# Altium PCB AccShelf.PcbDoc
Units mil, origin at the board's own origin, x right, y up, seen from the top; angles counter-clockwise.
Board outline 7677.17 x 2834.65 mil, 2 copper layers (Top Layer, Bottom Layer); 34 components, 51 nets, 183 pads, 99 vias.
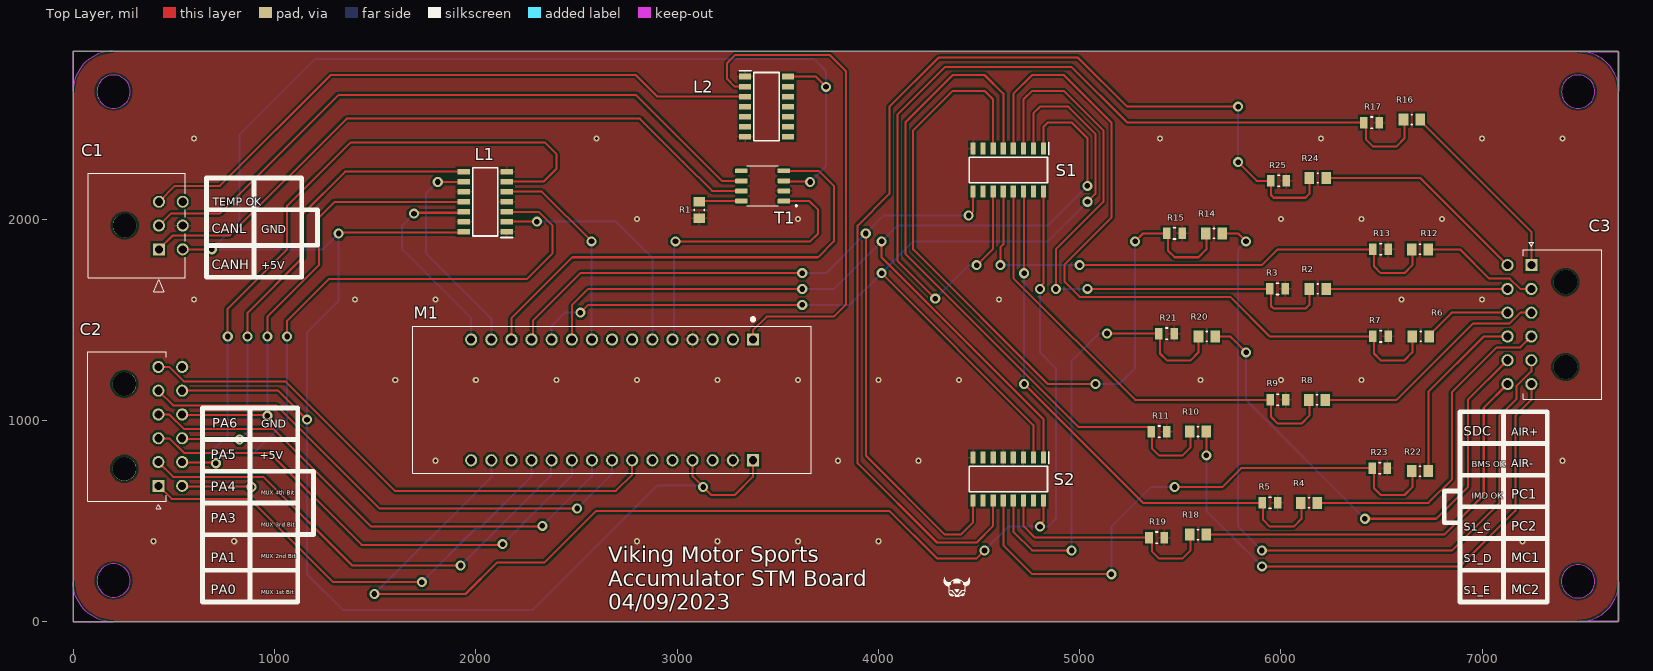
[diagram p0: Top Layer view]
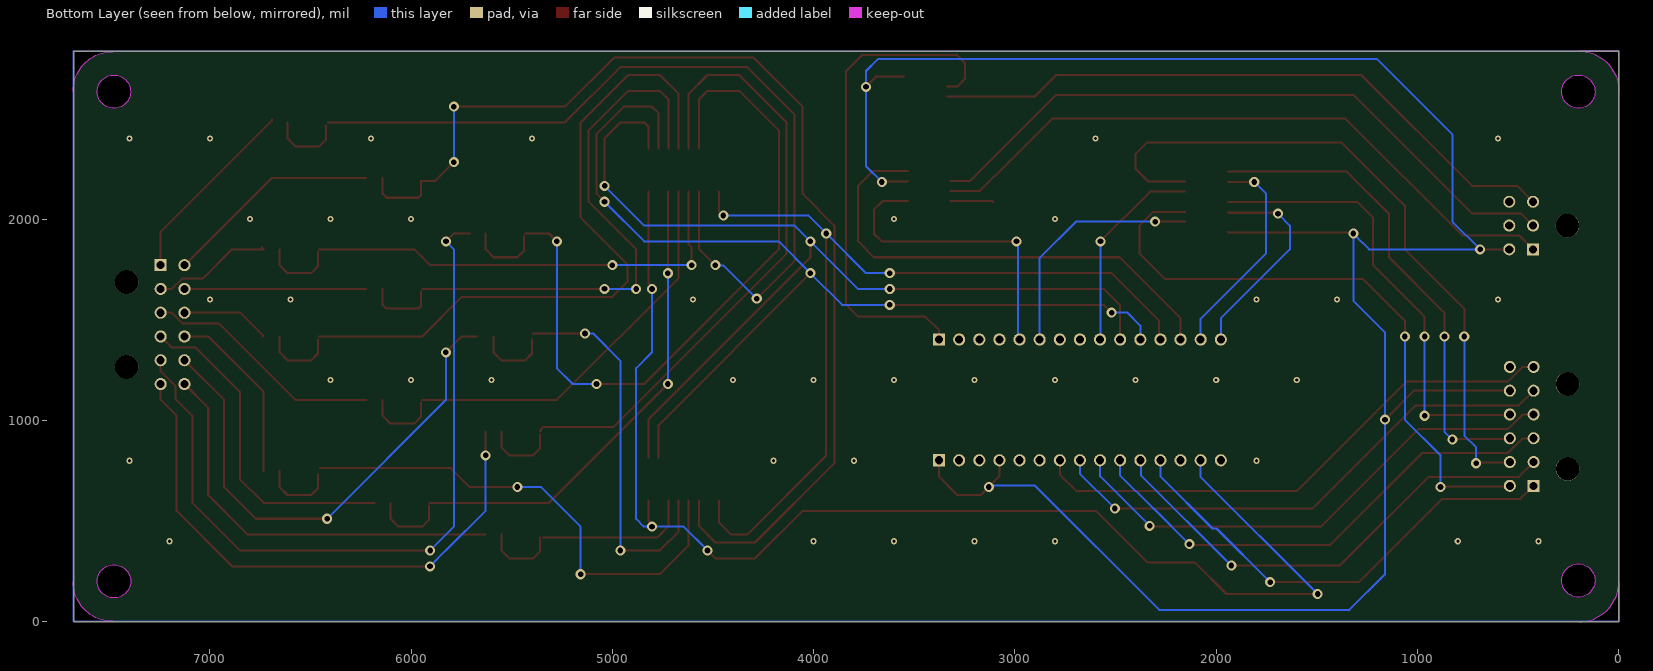
[diagram p1: Bottom Layer view, seen from below]
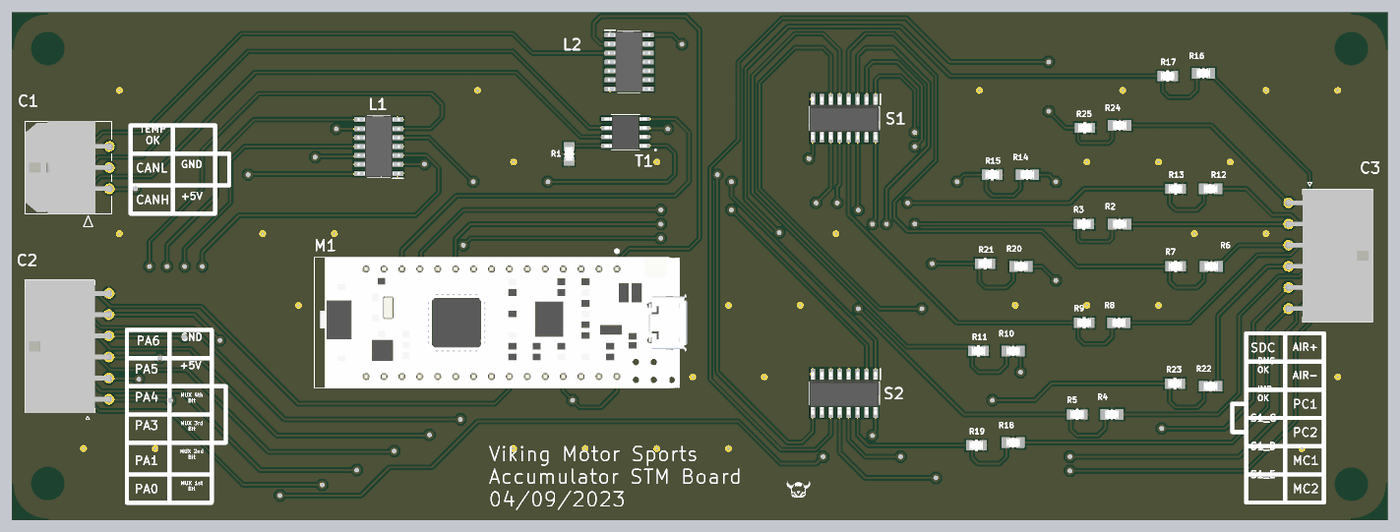
[diagram p2: 3D render of the assembled board from above, using the file's embedded part models]

## Layer stack, top to bottom
Top Solder: solder mask 0.4, Solder Resist, Dk 3.5
Top Layer: signal copper 1.4
Dielectric 1: dielectric 12.6, FR-4, Dk 4.8
Bottom Layer: signal copper 1.4
Bottom Solder: solder mask 0.4, Solder Resist, Dk 3.5

## Board outline
0,0 0,2834.65 7677.17,2834.65 7677.17,0
cut-out: 118.11,2633.72 ccw(c200.79,2633.72) 200.79,2551.05 ccw(c200.79,2633.72) 283.46,2633.72 ccw(c200.79,2633.72) 200.79,2716.4 ccw(c200.79,2633.72)
cut-out: 0,2834.65 196.85,2834.65 ccw(c196.85,2637.8) 0,2637.79
cut-out: 7393.7,2633.72 ccw(c7476.38,2633.72) 7476.38,2551.05 ccw(c7476.38,2633.72) 7559.06,2633.72 ccw(c7476.38,2633.72) 7476.38,2716.4 ccw(c7476.38,2633.72)
cut-out: 7482.1,1.54 ccw(c7482.1,198.21) 7678.77,198.21 7678.77,1.54
cut-out: 7678.77,2636.43 ccw(c7482.1,2636.43) 7482.1,2833.11 7678.77,2833.11
cut-out: 0,0 196.85,0 cw(c196.85,196.85) 0,196.85
cut-out: 118.11,204.99 ccw(c200.79,204.99) 200.79,122.32 ccw(c200.79,204.99) 283.46,204.99 ccw(c200.79,204.99) 200.79,287.67 ccw(c200.79,204.99)
cut-out: 7393.57,200.79 ccw(c7476.24,200.79) 7476.24,118.11 ccw(c7476.24,200.79) 7558.92,200.79 ccw(c7476.24,200.79) 7476.24,283.46 ccw(c7476.24,200.79)

## Design rules (kind name [scope] priority, off if disabled: settings)
Clearance [All] p1: gap=10 ignorepadtopadclearanceinfootprint=FALSE except(0: Arc-Hole Track-Hole SMDPad-Hole THPad-Hole Via-Hole Fill-Hole Poly-Hole Region-Hole Text-Hole)
PolygonConnect [All] p1: connectstyle=Relief reliefconductorwidth=10 reliefentries=4 polygonreliefangle="90 Angle" airgapwidth=10
RoutingVias [All] p1: holewidth=28 width=50 viastyle="Through Hole" minholewidth=28 minwidth=50 maxholewidth=28 maxwidth=50
SolderMaskExpansion [All] p1: expansion=4 istentingtop=FALSE
Width [All] p1: maxlimit=10 minlimit=10 preferedwidth=10
30 further rules are at their usual default settings.

## Components (designator, comment, footprint, x,y, rotation, side; value= is the part's Value field where it differs from the comment)
C1 "0430450601" "6 Pin Dual Connector" 425.98,1850.39 r270 top
C2 "2125281200" "12 Pin Dual Inline Connector" 423.29,675.49 r270 top
C3 "2125281200" "12 Pin Dual Inline Connector" 7244.09,1771.65 r90 top
L1 "74AHCT125S14-13" "Level Shifter" 2047.24,2086.61 r180 top
L2 "74AHCT125S14-13" "Level Shifter" 3444.88,2559.06 r0 top
M1 "NUCLEO-F303K8" "STM Footprint" 2677.17,1102.36 r270 top
R1 "CRCW080510K0FKEA" FP-CRCW0805-e3-IPC_A 3110.24,2045.24 r90 top value=10kR
R2 "CRCW0805270KFKEA" FP-CRCW0805-e3-IPC_A 6183.1,1653.54 r180 top
R3 "CRCW0805100KFKEA" FP-CRCW0805-e3-MFG 5983.27,1653.54 r0 top
R4 "CRCW0805270KFKEA" FP-CRCW0805-e3-IPC_A 6139.73,590.55 r180 top
R5 "CRCW0805100KFKEA" FP-CRCW0805-e3-MFG 5945.87,590.55 r0 top
R6 "CRCW0805270KFKEA" FP-CRCW0805-e3-IPC_A 6694.92,1417.32 r180 top
R7 "CRCW0805100KFKEA" FP-CRCW0805-e3-MFG 6495.08,1417.32 r0 top
R8 "CRCW0805270KFKEA" FP-CRCW0805-e3-IPC_A 6179.1,1102.36 r180 top
R9 "CRCW0805100KFKEA" FP-CRCW0805-e3-MFG 5985.24,1102.36 r0 top
R10 "CRCW0805270KFKEA" FP-CRCW0805-e3-IPC_A 5588.55,944.88 r180 top
R11 "CRCW0805100KFKEA" FP-CRCW0805-e3-MFG 5394.69,944.88 r0 top
R12 "CRCW0805270KFKEA" FP-CRCW0805-e3-IPC_A 6690.91,1850.39 r180 top
R13 "CRCW0805100KFKEA" FP-CRCW0805-e3-MFG 6495.08,1850.39 r0 top
R14 "CRCW0805270KFKEA" FP-CRCW0805-e3-IPC_A 5667.29,1929.13 r180 top
R15 "CRCW0805100KFKEA" FP-CRCW0805-e3-MFG 5471.46,1929.13 r0 top
R16 "CRCW0805270KFKEA" FP-CRCW0805-e3-IPC_A 6650.68,2495.08 r180 top
R17 "CRCW0805100KFKEA" FP-CRCW0805-e3-MFG 6450.98,2480.31 r0 top
R18 "CRCW0805270KFKEA" FP-CRCW0805-e3-IPC_A 5588.55,433.07 r180 top
R19 "CRCW0805100KFKEA" FP-CRCW0805-e3-MFG 5383.12,418.31 r0 top
R20 "CRCW0805270KFKEA" FP-CRCW0805-e3-IPC_A 5631.92,1417.32 r180 top
R21 "CRCW0805100KFKEA" FP-CRCW0805-e3-MFG 5432.21,1432.09 r0 top
R22 "CRCW0805270KFKEA" FP-CRCW0805-e3-IPC_A 6690.91,748.03 r180 top
R23 "CRCW0805100KFKEA" FP-CRCW0805-e3-MFG 6491.2,762.8 r0 top
R24 "CRCW0805270KFKEA" FP-CRCW0805-e3-IPC_A 6183.1,2204.72 r180 top
R25 "CRCW0805100KFKEA" FP-CRCW0805-e3-MFG 5989.11,2190.94 r0 top
S1 "SN74HC165QDRQ1" "Shift Register" 4645.67,2244.09 r270 top
S2 "SN74HC165QDRQ1" "Shift Register" 4645.67,708.66 r270 top
T1 "MCP2551-I/SN" "CAN Transceiver" 3425.2,2165.35 r180 top

## Footprints (in the part's own frame and the unit in brackets; to place one, negate y for a bottom-side part, rotate by r counter-clockwise, add the part's x,y. Pads: shape width x height; smd on the part's side, far side on the other; paste and mask are expansions set on the pad)
"6 Pin Dual Connector" [mm]
  rect 1.52x1.52 hole 1.02 mask+0.076: 1(0,0)
  round 1.52 hole 1.02 mask+0.076: 2(-3,0) 3(-6,0) 4(0,3) 5(-3,3) 6(-6,3)
  round 3 hole 3 unplated mask+0.076: M1(-3,-4.32)
  silkscreen extent -9.57,-8.92 5.35,3.32, body extent -9.59,-8.91 3.56,3.33, height 8.78
"12 Pin Dual Inline Connector" [mm]
  rect 1.52x1.52 / inner round 1.52 / far side rect 1.52x1.52 hole 1.02 mask+0.076: 1(0,0)
  round 1.52 hole 1.02 mask+0.076: 2(-3,0) 3(-6,0) 4(-9,0) 5(-12,0) 6(-15,0) 7(0,3) 8(-3,3) 9(-6,3) 10(-9,3) 11(-12,3) 12(-15,3)
  round 3 hole 3 unplated mask+0.076: ""(-12.84,-4.3) ""(-2.14,-4.3)
  silkscreen extent -16.93,-8.9 2.9,1.01, body extent -16.92,-8.89 1.93,3.29, height 8.81
"CAN Transceiver" [mm]
  rrect25% 1.58x0.6 smd: 1(-2.67,1.905) 2(-2.67,0.635) 3(-2.67,-0.635) 4(-2.67,-1.905) 5(2.67,-1.905) 6(2.67,-0.635) 7(2.67,0.635) 8(2.67,1.905)
  silkscreen extent -4.35,-2.52 1.99,2.6, body extent -3,-2.45 3,2.45, height 1.76
FP-CRCW0805-e3-IPC_A [mil]
  rect 47.5x59.38 smd paste+0 mask+0: 1(-41.37,0) 2(41.37,0)
  silkscreen extent -3,-25 3,25, body extent -85,-49 85,49, height 10
FP-CRCW0805-e3-MFG [mm]
  rect 0.95x1.45 smd paste+0 mask+0: 1(-0.975,0) 2(0.975,0)
  silkscreen extent -0.13,-0.7 0.13,0.7, body extent -1.55,-0.82 1.55,0.82, height 0.25
"Level Shifter" [mm]
  rect 1.528x0.7 smd: 1(-2.711,3.81) 2(-2.711,2.54) 3(-2.711,1.27) 4(-2.711,0) 5(-2.711,-1.27) 6(-2.711,-2.54) 7(-2.711,-3.81) 8(2.711,-3.81) 9(2.711,-2.54) 10(2.711,-1.27) 11(2.711,0) 12(2.711,1.27) 13(2.711,2.54) 14(2.711,3.81)
  silkscreen extent -3.47,-4.32 1.6,4.51, body extent -10,-3.38 10,3.38, height 5.8
"Shift Register" [mm]
  rect 1.525x0.65 smd: 1(-2.712,4.445) 2(-2.712,3.175) 3(-2.712,1.905) 4(-2.712,0.635) 5(-2.712,-0.635) 6(-2.712,-1.905) 7(-2.712,-3.175) 8(-2.712,-4.445) 9(2.712,-4.445) 10(2.712,-3.175) 11(2.712,-1.905) 12(2.712,-0.635) 13(2.712,0.635) 14(2.712,1.905) 15(2.712,3.175) 16(2.712,4.445)
  silkscreen extent -3.47,-4.95 1.6,5.12, body extent -10,-3.38 10,3.38, height 5.8
"STM Footprint" [mm]
  rect 1.53x1.53 hole 1.02: 1(-7.62,17.78) 16(7.62,17.78)
  round 1.53 hole 1.02: 2(-7.62,15.24) 3(-7.62,12.7) 4(-7.62,10.16) 5(-7.62,7.62) 6(-7.62,5.08) 7(-7.62,2.54) 8(-7.62,0) 9(-7.62,-2.54) 10(-7.62,-5.08) 11(-7.62,-7.62) 12(-7.62,-10.16) 13(-7.62,-12.7) 14(-7.62,-15.24) 15(-7.62,-17.78) 17(7.62,15.24) 18(7.62,12.7) 19(7.62,10.16) 20(7.62,7.62) 21(7.62,5.08) 22(7.62,2.54) 23(7.62,0) 24(7.62,-2.54) 25(7.62,-5.08) 26(7.62,-7.62) 27(7.62,-10.16) 28(7.62,-12.7) 29(7.62,-15.24) 30(7.62,-17.78)
  silkscreen extent -10.36,-25.14 9.27,25.14, body extent -9.27,-24.29 9.27,27.71, height 8.51

## Part data
C1: "Rectangular Power Connector, 6 Contact(s), Male, Solder Terminal, Receptacle", Color=Black, Contact Resistance=10mR, Dielectric Withstanding Voltage (AC)=1.5kV, Flammability Rating="UL94 V-0", Insulation Resistance=1GR, Manufacturer=Sullins, Manufacturer Part Number=PPPC032LJBN-RC, Max Operating Temperature=105°C, Min Operating Temperature=-40°C, Package Quantity=1000, Rated Current (Signal)=5A, Supplier Part Number=S5556-ND, Board Mounting Option=PEG, Body Breadth=0.345inch, Body Depth=0.48inch, Body Length=0.498inch, Body/Shell Style=RECEPTACLE, Category=Connectors, ComponentLink1Description=https://drawings-pdf.s3.amazonaws.com/10494.pdf?src-supplier=Digi-Key, ComponentLink1URL=https://drawings-pdf.s3.amazonaws.com/10494.pdf?src-supplier=Digi-Key, ComponentLink2Description=http://www.farnell.com/datasheets/2696385.pdf?src-supplier=Farnell, ComponentLink2URL=http://www.farnell.com/datasheets/2696385.pdf?src-supplier=Farnell, ComponentLink3Description=http://www.farnell.com/datasheets/2696385.pdf?src-supplier=Newark, ComponentLink3URL=http://www.farnell.com/datasheets/2696385.pdf?src-supplier=Newark, ComponentLink4Description=http://www.farnell.com/datasheets/2696385.pdf?src-supplier=Element14, ComponentLink4URL=http://www.farnell.com/datasheets/2696385.pdf?src-supplier=Element14, ComponentLink5Description=https://datasheet.ciiva.com:443/pdfs/VipMasterIC/IC/MOLE/MOLE-S-A0003536766/MOLE-S-A0003536766-1.pdf?src-supplier=IHS+Markit, ComponentLink5URL=https://datasheet.ciiva.com:443/pdfs/VipMasterIC/IC/MOLE/MOLE-S-A0003536766/MOLE-S-A0003536766-1.pdf?src-supplier=IHS+Markit, Connector Type=Header, Contact Finish - Mating="MATTE TIN", Contact Finish - Termination="Matte Tin (Sn) - with Nickel (Ni) barrier", Contact Gender=Male, Contact Material=Bronze, Contact Pattern=RECTANGULAR, Contact Plating=Gold, Contact Style="SQ PIN-SKT", Contact Type="Female Socket", DIN Conformance=No, Durability=30Cycles, Empty Shell=No, Filter Feature=No, Height=5mm, Housing Color=Black, Housing Material=Plastic, IEC Conformance=No, Insertion Force-Max=11.5648N, Insulation Color=Black, Insulation Material=Polymer, JESD-609 Code=e3, Lead Free="Lead Free", Length=8.12mm, Mating Contact Pitch=0.118inch, Mating Contact Row Spacing=0.118inch, Mating Information="MULTIPLE MATING PARTS AVAILABLE", MIL Conformance=No, Mixed Contacts=No, Mounting Option 1="POLARIZED LCK", Mounting Option 2=LOCKING, Mounting Style="RIGHT ANGLE", Mounting Technology="Through Hole", Number Of Connectors=1, Number of Contacts=6, Number Of PCB Rows=2, Number of Positions=6, Number of Rows=2, Number of Rows Loaded=2, Option="General Purpose", Packaging=Bulk, PCB Contact Pattern=RECTANGULAR, PCB Contact Row Spacing=2.9972mm, Pitch=0.1inch, Plating Thickness=15uin, Polarization Key="POLARIZED HOUSING", Pricing="1=0.87000, 10=0.73600, 100=0.66130, 500=0.54108, 1000=0.48096, 5000=0.43420 (USD)", Reach SVHC Compliant=Yes, Reference Standard=UL, Reliability=COMMERCIAL, RoHS=Yes, RoHS Compliant=Yes, Row Spacing=0.1inch, Shell Material=Polymer, Stock=1878, Supplier=Digi-Key, Terminal Length=0.125inch, Terminal Pitch=2.9972mm, Termination=Solder, Width=8.5mm, Withdrawl Force-Min=3.0024N
C2 C3: "Conn Micro-Fit Power HDR 12 POS 3mm Solder RA Through Hole 12 Terminal Single Port Tray", Manufacturer=Molex, Manufacturer Part Number=212528-1200, Package=None, Supplier Part Number=538-212528-1200, Availability=Unavailable, Category="Headers and Wire Housings", ComponentLink1Description=http://datasheet.octopart.com/2125281200-Molex-datasheet-147959482.pdf?src-supplier=Rs, ComponentLink1URL=http://datasheet.octopart.com/2125281200-Molex-datasheet-147959482.pdf?src-supplier=Rs, MF="{'manufacturer': u'Molex'}", MP=2125281200, Price=None, Pricing="1=3.35000, 10=2.96000, 50=2.96000, 100=2.96000, 1000=2.28000, 10000=1.94000 (USD)", RoHS=No, Stock=1070, Supplier=Mouser
L1 L2: library part SN74AHCT126DR, "Bus Driver, AHCT/VHCT/VT Series, 4-Func, 1-Bit, True Output, CMOS, PDSO14", Case/Package=SOP, Load Capacitance (CL)=50pF, Manufacturer=Diodes, Manufacturer_Name="Diodes Inc.", Max Operating Temperature=125°C, Max Supply Voltage=5.5V, Min Operating Temperature=-40°C, Min Supply Voltage=4.5V, Mouser Part Number=621-74AHCT125S14-13, Nominal Supply Voltage=5V, Package Body Material=Plastic, Package Equivalence Code=SOP14,.25, Package Shape=Rectangular, Package Style="SMALL OUTLINEMeter", Peak Reflow Temperature (Cel)=260°C, Power Supply Current-Max (ICC)=40uA, Temperature Grade=AUTOMOTIVE, Time @ Peak Reflow Temperature-Max (s)=40s, Arrow Part Number=74AHCT125S14-13, Arrow Price/Stock=https://www.arrow.com/en/products/74ahct125s14-13/diodes-incorporated?region=nac, Category="Buffers, Drivers and Transceivers", Channels=4, ComponentLink1Description=https://datasheet.ciiva.com:443/pdfs/VipMasterIC/IC/DIOD/DIODS15860/DIODS15860-1.pdf?src-supplier=IHS+Markit, ComponentLink1URL=https://datasheet.ciiva.com:443/pdfs/VipMasterIC/IC/DIOD/DIODS15860/DIODS15860-1.pdf?src-supplier=IHS+Markit, ComponentLink2Description=https://datasheet.ciiva.com/25651/74ahct125-25651120.pdf?src-supplier=Digi-Key, ComponentLink2URL=https://datasheet.ciiva.com/25651/74ahct125-25651120.pdf?src-supplier=Digi-Key, ComponentLink3Description=https://datasheet.ciiva.com/29883/74ahct125-29883446.pdf?src-supplier=Avnet, ComponentLink3URL=https://datasheet.ciiva.com/29883/74ahct125-29883446.pdf?src-supplier=Avnet, Control Type="ENABLE LOW", Datasheet Link=http://uk.rs-online.com/web/p/products/7988941, Geometry.Height=1.73mm, Height - Seated (Max)=1.73mm, JESD-30 Code=R-PDSO-G14, JESD-609 Code=e3, Length=8.635mm, Logic Type="BUS DRIVER", Manufacturer Part Number=74AHCT125S14-13, Manufacturer_Part_Number=74AHCT125S14-13, Max I(ol)=8mA, Moisture Sensitivity Level=1, Mouser Price/Stock=https://www.mouser.co.uk/ProductDetail/Diodes-Incorporated/74AHCT125S14-13?qs=pYVYkI7xuRUA0d%2Fp2SGl5A%3D%3D, Number of Bits=1, Number of Ports=2, Output Characteristics=3-STATE, Output Polarity=True, Packaging="Tape and Reel", Pins=14, Power Supplies=5V, Pricing="2500=0.06080, 5000=0.05862, 10000=0.05686, 15000=0.05520, 20000=0.05312, 25000=0.05229, 250000=0.05146 (USD)", Prop. Delay@Nom-Sup=9.5ns, Propagation Delay (tpd)=9.5ns, Qualification Status="Not Qualified", Reach SVHC Compliant=Yes, RoHS=Yes, RoHS Compliant=Yes, Stock=22500, Supplier=Avnet, Supplier Part Number=74AHCT125S14-13, Surface Mount=Yes, Technology=CMOS, Terminal Finish=Tin, Terminal Form="Gull Wing", Terminal Pitch=1.27mm, Terminal Position=DUAL, Width=3.895mm
M1: "Boards/Accessories", Manufacturer=STMicroelectronics, Supplier Part Number=68Y1244, Category="Embedded Processors and Controllers", ComponentLink1Description=http://www.farnell.com/datasheets/2064195.pdf?src-supplier=Farnell, ComponentLink1URL=http://www.farnell.com/datasheets/2064195.pdf?src-supplier=Farnell, ComponentLink2Description=http://www.st.com/content/ccc/resource/technical/document/data_brief/b1/d8/13/d4/b0/b7/4b/6e/DM00214578.pdf/files/DM00214578.pdf/jcr:content/translations/en.DM00214578.pdf?src-supplier=Digi-Key, ComponentLink2URL=http://www.st.com/content/ccc/resource/technical/document/data_brief/b1/d8/13/d4/b0/b7/4b/6e/DM00214578.pdf/files/DM00214578.pdf/jcr:content/translations/en.DM00214578.pdf?src-supplier=Digi-Key, ComponentLink3Description=http://www.st.com/st-web-ui/static/active/en/resource/technical/document/user_manual/DM00116575.pdf?s_searchtype=keyword&src-supplier=Avnet, ComponentLink3URL=http://www.st.com/st-web-ui/static/active/en/resource/technical/document/user_manual/DM00116575.pdf?s_searchtype=keyword&src-supplier=Avnet, ComponentLink4Description=http://www.farnell.com/datasheets/1966773.pdf?src-supplier=Element14, ComponentLink4URL=http://www.farnell.com/datasheets/1966773.pdf?src-supplier=Element14, ComponentLink5Description=http://www.farnell.com/datasheets/2064195.pdf?src-supplier=Newark, ComponentLink5URL=http://www.farnell.com/datasheets/2064195.pdf?src-supplier=Newark, Core Architecture=ARM, Evaluation Kit=Yes, Lead Free="Lead Free", Manufacturer Part Number=NUCLEO-F303K8, Number of Bits=32, Pricing="1=10.33000 (USD)", Reach SVHC Compliant=Yes, RoHS=No, Series=STM32F3, Stock=226, Supplier=Newark
R1: library part CMP-2001-04908-2, "RES Thick Film, 10kΩ, 1%, 0.125W, 100ppm/°C, 0805", Case Code (Imperial)=0805, Case Code (Metric)=2012, Manufacturer=Vishay, Max Operating Temperature=155°C, Min Operating Temperature=-55°C, Package Height=0.45mm, Package Length=2mm, Package Quantity=5000, Package Shape=Rectangular, Package Style=SMTMeter, Package Width=1.25mm, Power=125mW, Rated Temperature=70°C, Resistance=10kR, Resistor Type="FIXED RESISTOR", Supplier Part Number=24W3284, Temperature Coefficient=100ppm/°C, Tolerance=1%, Voltage Rating=150V, Case/Package=0805, Category="Chip SMD Resistors", ComponentLink1Description=https://datasheet.ciiva.com:443/pdfs/VipMasterIC/IC/VISH/VISH-S-A0007266705/VISH-S-A0007266705-1.pdf?src-supplier=IHS+Markit, ComponentLink1URL=https://datasheet.ciiva.com:443/pdfs/VipMasterIC/IC/VISH/VISH-S-A0007266705/VISH-S-A0007266705-1.pdf?src-supplier=IHS+Markit, ComponentLink2Description=https://datasheet.ciiva.com/46394/1720486-46394381.pdf?src-supplier=Element14, ComponentLink2URL=https://datasheet.ciiva.com/46394/1720486-46394381.pdf?src-supplier=Element14, ComponentLink3Description=https://datasheet.ciiva.com/16719/70201119-16719082.pdf?src-supplier=Allied+Electronics, ComponentLink3URL=https://datasheet.ciiva.com/16719/70201119-16719082.pdf?src-supplier=Allied+Electronics, ComponentLink4Description=https://datasheet.ciiva.com/16755/70201119-16755389.pdf?src-supplier=Allied+Electronics, ComponentLink4URL=https://datasheet.ciiva.com/16755/70201119-16755389.pdf?src-supplier=Allied+Electronics, ComponentLink5Description=https://datasheet.ciiva.com/5547/dcrcwe3-109170-5547559.pdf?src-supplier=Mouser, ComponentLink5URL=https://datasheet.ciiva.com/5547/dcrcwe3-109170-5547559.pdf?src-supplier=Mouser, Composition="Thick Film", Construction=Chip, Contact Plating=Tin, Depth=1.25mm, Height=0.45mm, JESD-609 Code=e3, Lead Free="Lead Free", Length=2mm, Manufacturer Part Number=CRCW080510K0FKEA, Military Standard=Not, Mounting Technology="Surface Mount", Packaging="Tape and Reel", Pins=2, Power Rating=125mW, Pricing="1=0.00800, 5000=0.00800 (USD)", Radiation Hardening=No, Reach SVHC Compliant=Yes, Reference Standard=AEC-Q200, RoHS=Yes, RoHS Compliant=Yes, Stock=980000, Supplier=Newark, Technology="METAL GLAZE/THICK FILM", Terminal Finish=Nickel, Termination=SMD/SMT, Voltage Rating (DC)=150V, Weight=0.000194oz, Width=1.25mm, Working Voltage=150V
R2 R4 R6 R8 R10 R12 R14 R16 R18 R20 R22 R24: library part CMP-2001-03733-2, "RES Thick Film, 270kΩ, 1%, 0.125W, 100ppm/°C, 0805", Case Code (Imperial)=0805, Case Code (Metric)=2012, Max Operating Temperature=155°C, Min Operating Temperature=-55°C, Package Quantity=5000, Power Rating=125mW, Resistance=270kR, Temperature Coefficient=100ppm/°C, Tolerance=1%, Voltage Rating=150V, Case/Package=0805, Composition="Thick Film", Contact Plating=Tin, Depth=1.25mm, Height=0.45mm, Lead Free="Lead Free", Length=2mm, Military Standard=Not, Number of Pins=2, Packaging="Tape and Reel", Radiation Hardening=No, Termination=SMD/SMT, Voltage Rating (DC)=150V, Weight=0.000194oz, Width=1.25mm
R3 R5 R7 R9 R11 R13 R15 R17 R19 R21 R23 R25: library part CMP-2001-04899-2, "RES Thick Film, 100kΩ, 1%, 0.125W, 100ppm/°C, 0805", Case Code (Imperial)=0805, Case Code (Metric)=2012, Max Operating Temperature=155°C, Min Operating Temperature=-55°C, Package Quantity=5000, Power Rating=125mW, Resistance=100kR, Temperature Coefficient=100ppm/°C, Tolerance=1%, Voltage Rating=150V, Case/Package=0805, Composition="Thick Film", Contact Plating=Tin, Depth=1.25mm, Height=0.45mm, Lead Free="Lead Free", Length=2mm, Military Standard=Not, Mount="Surface Mount", Number of Pins=2, Packaging="Tape and Reel", Radiation Hardening=No, Termination=SMD/SMT, Voltage Rating (DC)=150V, Weight=0.000194oz, Width=1.25mm
S1 S2: "Parallel In Serial Out, HC Series, 8-Bit, Right Direction, Complementary Output, CMOS, PDSO16", Case/Package=SOP, Manufacturer="Texas Instruments", Max Frequency@Nom-Sup=25MHz, Max Operating Temperature=125°C, Max Supply Voltage=6V, Min Operating Temperature=-40°C, Min Supply Voltage=2V, Mouser Part Number=595-SN74HC165QDRQ1, Nominal Supply Voltage=5V, Package Body Material=Plastic, Package Equivalence Code=SOP16,.25, Package Shape=Rectangular, Package Style="SMALL OUTLINEMeter", Peak Reflow Temperature (Cel)=260°C, Power Supplies=2/6V, Supplier Part Number=296-35928-1-ND, Temperature Grade=AUTOMOTIVE, Arrow Part Number=SN74HC165QDRQ1, Arrow Price/Stock=https://www.arrow.com/en/products/sn74hc165qdrq1/texas-instruments, Category="Shift Registers", Channels=1, Clock Edge Trigger Type="Positive Edge", ComponentLink1Description=https://www.ti.com:443/lit/ds/symlink/sn74hc165-q1.pdf?src-supplier=IHS+Markit, ComponentLink1URL=https://www.ti.com:443/lit/ds/symlink/sn74hc165-q1.pdf?src-supplier=IHS+Markit, ComponentLink2Description=https://datasheet.ciiva.com/18575/sn74hc165-q1-18575046.pdf?src-supplier=Digi-Key, ComponentLink2URL=https://datasheet.ciiva.com/18575/sn74hc165-q1-18575046.pdf?src-supplier=Digi-Key, ComponentLink3Description=https://datasheet.ciiva.com/18575/sn74hc165-q1-18575047.pdf?src-supplier=Digi-Key, ComponentLink3URL=https://datasheet.ciiva.com/18575/sn74hc165-q1-18575047.pdf?src-supplier=Digi-Key, ComponentLink4Description=https://datasheet.ciiva.com/18575/sn74hc165-q1-18575048.pdf?src-supplier=Digi-Key, ComponentLink4URL=https://datasheet.ciiva.com/18575/sn74hc165-q1-18575048.pdf?src-supplier=Digi-Key, ComponentLink5Description=https://datasheet.ciiva.com/48704/001074775-da-01-en-ic-shift-regi-sn74hc165qdrq1-soic-16-tid-48704119.pdf?src-supplier=Conrad, ComponentLink5URL=https://datasheet.ciiva.com/48704/001074775-da-01-en-ic-shift-regi-sn74hc165qdrq1-soic-16-tid-48704119.pdf?src-supplier=Conrad, Count Direction=RIGHT, Datasheet Link=http://www.ti.com/lit/gpn/sn74hc165-q1, fmax-Min=25MHz, Geometry.Height=1.75mm, Height - Seated (Max)=1.75mm, JESD-30 Code=R-PDSO-G16, JESD-609 Code=e4, Length=9.9mm, Logic Type="PARALLEL IN SERIAL OUT", Manufacturer Part Number=SN74HC165QDRQ1, Manufacturer_Name="Texas Instruments", Manufacturer_Part_Number=SN74HC165QDRQ1, Moisture Sensitivity Level=1, Mouser Price/Stock=https://www.mouser.co.uk/ProductDetail/Texas-Instruments/SN74HC165QDRQ1?qs=AgY10sKTvDLN6%2Fwfup846w%3D%3D, Number of Bits=8, Output Polarity=Complementary, Pins=16, Pricing="1=0.62000, 10=0.54200, 25=0.50920, 100=0.41570, 250=0.38612, 500=0.32860, 1000=0.26288 (USD)", Propagation Delay (tpd)=225ns, Qualification Status="Not Qualified", Reach SVHC Compliant=Yes, RoHS=Yes, RoHS Compliant=Yes, Supplier=Digi-Key, Surface Mount=Yes, Technology=CMOS, Terminal Finish=Nickel, Terminal Form="Gull Wing", Terminal Pitch=1.27mm, Terminal Position=DUAL, Width=3.9mm
T1: "CAN Transceiver, 1-Trnsvr, PDSO8", Case/Package=SOIC, Manufacturer=Microchip, Max Operating Temperature=85°C, Max Supply Current=75mA, Max Supply Voltage=5.5V, Min Operating Temperature=-40°C, Min Supply Voltage=4.5V, Operating Supply Voltage=5V, Package=None, Package Body Material=Plastic, Package Equivalence Code=SOP8,.25, Package Quantity=100, Package Shape=Rectangular, Package Style="SMALL OUTLINEMeter", Peak Reflow Temperature (Cel)=260°C, Supplier Part Number=69K7604, Temperature Grade=INDUSTRIAL, Time @ Peak Reflow Temperature-Max (s)=40s, Availability=Unavailable, Category="Interface ICs", Channels=1, ComponentLink1Description=https://datasheet.ciiva.com/27056/2040583-27056423.pdf?src-supplier=Jameco, ComponentLink1URL=https://datasheet.ciiva.com/27056/2040583-27056423.pdf?src-supplier=Jameco, ComponentLink2Description=https://datasheet.ciiva.com/8084/jp011797-8084592.pdf?src-supplier=Avnet, ComponentLink2URL=https://datasheet.ciiva.com/8084/jp011797-8084592.pdf?src-supplier=Avnet, ComponentLink3Description=https://datasheet.ciiva.com/14152/eb644223-644224-e-14152540.pdf?src-supplier=Distrelec, ComponentLink3URL=https://datasheet.ciiva.com/14152/eb644223-644224-e-14152540.pdf?src-supplier=Distrelec, ComponentLink4Description=https://datasheet.ciiva.com/1495/21667f-1495089.pdf?src-supplier=Element14, ComponentLink4URL=https://datasheet.ciiva.com/1495/21667f-1495089.pdf?src-supplier=Element14, ComponentLink5Description=https://datasheet.ciiva.com/1700/21667f-1700023.pdf?src-supplier=Digi-Key, ComponentLink5URL=https://datasheet.ciiva.com/1700/21667f-1700023.pdf?src-supplier=Digi-Key, ComponentLink6Description=https://datasheet.ciiva.com:443/pdfs/VipMasterIC/IC/MCHP/MCHP-S-A0002782162/MCHP-S-A0002782162-1.pdf?src-supplier=IHS+Markit, ComponentLink6URL=https://datasheet.ciiva.com:443/pdfs/VipMasterIC/IC/MCHP/MCHP-S-A0002782162/MCHP-S-A0002782162-1.pdf?src-supplier=IHS+Markit, Contact Plating=Tin,Matte, Data Rate=1Mbps, Height=1.25mm, Height - Seated (Max)=1.75mm, Interface=Serial,CAN, JESD-30 Code=R-PDSO-G8, JESD-609 Code=e3, Lead Free="Lead Free", Length=4.9mm, Logic Function=Transceiver, Manufacturer Part Number=MCP2551-I/SN, Moisture Sensitivity Level=1, Mounting Technology="Surface Mount", MP=MCP2551-I/SN, Nominal Supply Current=75mA, Nominal Supply Voltage=5.5V, Number of Drivers=1, Number of Receive Buffers=1, Number of Receivers=1, Number of Terminals/Pins=8, Number of Transceivers=1, Number of Transmit Buffers=1, Packaging=Rail/Tube, Pins=8, Power Supplies=5V, Price=None, Pricing="1=1.37000, 10=1.32000, 25=1.26000, 50=1.26000, 100=1.25000 (USD)", Qualification Status="Not Qualified", Radiation Hardening=No, Reach SVHC Compliant=Yes, RoHS=Yes, RoHS Compliant=Yes, Slew Rate=8.5V/µs, Stock=47560, Supplier=Newark, Supply Current=75mA, Surface Mount=Yes, Technology=CMOS, Telecom IC Type="INTERFACE CIRCUIT", Terminal Finish=Tin, Terminal Form="Gull Wing", Terminal Pitch=1.27mm, Terminal Position=DUAL, Width=3.9mm

## Via types
v1: diameter 50, hole 28, Top Layer to Bottom Layer, tented both sides, 60 vias
v2: diameter 30, hole 15, Top Layer to Bottom Layer, 39 vias

## Nets (pads, with @x,y where several pads share a name; then routed paths per layer and width w, separated by ;. In a path a pad name is that pad's centre, name@x,y a point inside that pad or via, vN(x,y) a via of type N, cw(c..) or ccw(c..) an arc to the next point about the centre after c; other vN are vias at no path point)
"3.3 V": M1.29 S1.16 S2.16 | length 6443.8
  Top Layer w10: v1(1496.06,137.8) 1948.82,137.8 2106.3,295.28 2342.52,295.28 2598.43,551.18 4055.12,551.18 4291.34,314.96 4488.19,314.96 v1(4527.56,354.33) ; v1(4803.15,472.44) 4803.15,483.26 4820.67,500.78 S2.16 ; v1(4803.15,1653.54) 4803.15,1664.37 4820.67,1681.89 S1.16
  Bottom Layer w10: v1(1496.06,137.8) 2077.17,718.9 M1.29 ; v1(4527.56,354.33) 4645.67,472.44 v1(4803.15,472.44) 4803.78,473.07 4843.15,473.07 4881.89,511.81 4881.89,1259.84 4803.15,1338.58 v1(4803.15,1653.54)
"+5 V": C1.4 C2.11 L1.14 L2.14 M1.16 M1.19 T1.3 | length 11440.5
  Top Layer w10: C1.4@541.19,1846.89 542.94,1848.64 687.22,1848.64 v1(688.98,1850.39) ; C2.11 1018.06,1147.93 1161.42,1004.57 v1(1161.42,1003.94) ; v1(1318.9,1929.13) 1322.64,1932.87 1936.77,1932.87 L1.14 ; M1.19 3077.17,722.05 3169.29,629.92 3287.4,629.92 3377.17,719.69 M1.16 ; T1.3 3532.97,2187.7 3658.76,2187.7 v1(3661.42,2185.04) ; L2.14 3688.58,2709.06 v1(3740.16,2657.48)
  Bottom Layer w10: 1296.13,1906.36 1240.16,1850.39 ; v1(3129.92,669.29) 3123.23,675.98 2900.39,675.98 2283.46,59.06 1338.58,59.06 1161.42,236.22 v1(1161.42,1003.94) 1160.87,1004.48 1160.87,1436.47 1318.9,1594.49 v1(1318.9,1929.13) 1315.81,1926.05 1240.16,1850.39 ; v1(3661.42,2185.04) 3740.16,2263.78 v1(3740.16,2657.48) 3740.16,2736.22 3681.1,2795.28 1200.79,2795.28 826.77,2421.26 826.77,1988.19 v1(688.98,1850.39) 1240.16,1850.39
AIR+: C3.1 R16.1 | length 952.1
  Top Layer w10: R16.1 6692.06,2489.14 7244.09,1937.1 C3.1
AIR-: C3.2 R12.1 | length 610.5
  Top Layer w10: R12.1@6744.39,1862.5 R12.1 6889.76,1850.39 7035.14,1705.02 7138.03,1705.02 7189.51,1653.54 C3.2
BMS_OK: C3.8 R2.1 | length 901.5
  Top Layer w10: R2.1 C3.8
CANH: C1.1 T1.7 | length 3312.1
  Top Layer w10: C1.1 495.67,1920.08 778.35,1920.08 1358.27,2500 2814.96,2500 3031.5,2283.46 3174.61,2140.35 T1.7
CANL: C1.2 T1.6 | length 3340.4
  Top Layer w10: C1.2 485.04,2027.56 728.35,2027.56 1318.9,2618.11 2795.28,2618.11 3223.03,2190.35 T1.6
GND: C1.5 C2.12 L1.1 L1.4 L1.7 L1.10 L1.13 L2.1 L2.7 M1.4 M1.17 R1.1 R3.2 R5.2 R7.2 R9.2 R11.2 R13.2 R15.2 R17.2 R19.2 R21.2 R23.2 R25.2 S1.8 S2.3 S2.4 S2.5 S2.6 S2.8 T1.2
  other v2: 400,400 800,400 2800,400 3200,400 3600,400 4000,400 7200,400 1800,800 3800,800 4200,800 7400,800 1600,1200 2000,1200 2400,1200 2800,1200 3200,1200 3600,1200 4000,1200 4400,1200 5600,1200 6000,1200 6400,1200 600,1600 1400,1600 1800,1600 4600,1600 6600,1600 7000,1600 2800,2000 3600,2000 6000,2000 6400,2000 6800,2000 600,2400 2600,2400 5400,2400 6200,2400 7000,2400 7400,2400
IMD_OK: C3.9 R6.1 | length 442.1
  Top Layer w10: R6.1 6736.29,1423.26 6848.46,1535.43 C3.9
MC1_MC: C3.5 R14.1 | length 3787.9
  Top Layer w10: R14.1 5787.4,1929.13 v1(5826.77,1889.76) ; v1(5905.51,354.33) 6850.39,354.33 7086.61,590.55 7086.61,1023.62 7169.53,1106.54 7169.53,1170.06 7244.09,1244.63 C3.5
  Bottom Layer w10: v1(5826.77,1889.76) 5787.4,1850.39 5787.4,472.44 v1(5905.51,354.33)
MC1_PC: C3.3 R8.1 | length 1203
  Top Layer w10: R8.1 6574.8,1102.36 6953.35,1480.91 7134.99,1480.91 7189.51,1535.43 C3.3
MC2_MC: C3.6 R10.1 | length 2820
  Top Layer w10: v1(5629.92,826.77) R10.1 ; v1(5906.01,275.59) 6889.76,275.59 7165.35,551.18 7165.35,1023.62 7244.09,1102.36 C3.6
  Bottom Layer w10: v1(5629.92,826.77) 5629.92,551.18 5826.77,354.33 5827.27,354.33 v1(5906.01,275.59)
MC2_PC: C3.4 R4.1 | length 1659.1
  Top Layer w10: R4.1 6732.28,590.55 6850.39,708.66 6850.39,1141.73 7071.46,1362.8 7189.57,1362.8 C3.4
"MUX 1st Bit": L1.2 M1.6 | length 1204
  Top Layer w10: L1.2 2154.76,1987.4 2302.36,1987.4 v1(2303.15,1988.19)
  Bottom Layer w10: v1(2303.15,1988.19) 2696.85,1988.19 2877.17,1807.87 M1.6
"MUX 2nd Bit": L1.5 M1.9 | length 1011.8
  Top Layer w10: L1.5 2328.46,2136.61 v1(2575.31,1889.76)
  Bottom Layer w10: v1(2575.31,1889.76) 2575.31,1404.22 M1.9
"MUX 3rd Bit": L1.9 M1.14 | length 1072
  Top Layer w10: v1(1811.02,2185.04) 1811.81,2185.83 1939.72,2185.83 L1.9
  Bottom Layer w10: v1(1811.02,2185.04) 1751.97,2125.98 1751.97,1830.71 2077.17,1505.51 M1.14
"MUX 4th Bit": L1.12 M1.15 | length 1046.5
  Top Layer w10: v1(1692.91,2027.56) 1697.44,2032.09 1935.98,2032.09 L1.12 ; M1.15@1974.81,1404.72 M1.15
  Bottom Layer w10: v1(1692.91,2027.56) 1633.86,1968.5 1633.86,1850.39 1977.17,1507.09 M1.15
NetC1_3: C1.3 L2.3 | length 3237.3
  Top Layer w10: C1.3@406.3,2086.61 426.58,2086.61 505.32,2165.35 728.35,2165.35 1279.53,2716.54 2795.28,2716.54 2902.76,2609.06 L2.3
NetC2_1: C2.1 M1.27 | length 2350
  Top Layer w10: C2.1 488.54,610.24 877.95,610.24 1291.34,196.85 v1(1732.28,196.85)
  Bottom Layer w10: v1(1732.28,196.85) 1998.71,463.28 2018.39,463.28 2277.17,722.05 M1.27
NetC2_2: C2.2 M1.26 | length 2424.9
  Top Layer w10: C2.2 496.48,720.41 944.94,720.41 1385.83,279.53 v1(1925.2,279.53)
  Bottom Layer w10: v1(1925.2,279.53) 2374.02,728.35 2374.02,799.21 M1.26
NetC2_3: C2.3 M1.25 | length 2492.6
  Top Layer w10: C2.3 477.87,911.71 551.06,838.52 976.44,838.52 1433.07,381.89 2129.92,381.89 v1(2133.86,385.83)
  Bottom Layer w10: v1(2133.86,385.83) 2311.65,563.62 2313.67,563.62 2478.39,728.35 2478.39,801.13 M1.25
NetC2_4: C2.4 M1.24 | length 2568
  Top Layer w10: C2.4 477.87,1029.82 551.06,956.63 996.13,956.63 1480.32,472.44 2326.77,472.44 v1(2330.71,476.38)
  Bottom Layer w10: v1(2330.71,476.38) 2577.17,722.83 M1.24
NetC2_5: C2.5 M1.23 | length 2634.1
  Top Layer w10: C2.5 496.48,1074.74 1009.39,1074.74 1521.14,562.99 v1(2503.94,562.99)
  Bottom Layer w10: v1(2503.94,562.99) 2677.17,736.22 M1.23
NetC2_6: C2.6 M1.22 | length 2713.9
  Top Layer w10: C2.6 477.87,1266.04 551.06,1192.85 1055.15,1192.85 1598,650 2696,650 2777.17,731.17 M1.22
NetC2_7: C2.7 L1.3 | length 3098.6
  Top Layer w10: C2.7 544.5,672.39 882.73,672.39 v1(885.83,669.29) ; v1(1062.99,1417.32) 1062.99,1496.06 1269.68,1702.76 2253.94,1702.76 2381.89,1830.71 2381.89,1968.5 2313.78,2036.61 L1.3
  Bottom Layer w10: v1(885.83,669.29) 885.83,826.77 1062.99,1003.94 v1(1062.99,1417.32)
NetC2_8: C2.8 L1.6 | length 3435.3
  Top Layer w10: C2.8 544.5,790.5 705.56,790.5 v1(708.66,787.4) ; v1(767.72,1417.32) 767.72,1555.12 1062.99,1850.39 1062.99,2066.93 1377.95,2381.89 2342.52,2381.89 2401.57,2322.83 2401.57,2251.81 2336.38,2186.61 L1.6
  Bottom Layer w10: v1(708.66,787.4) 708.66,866.14 767.72,925.2 v1(767.72,1417.32)
NetC2_9: C2.9 L1.8 | length 2425.8
  Top Layer w10: C2.9 544.5,908.61 823.67,908.61 v1(826.77,905.51) ; v1(866.14,1417.32) 866.14,1535.43 1141.73,1811.02 1141.73,2027.56 1350.79,2236.61 L1.8
  Bottom Layer w10: v1(826.77,905.51) 866.14,944.88 v1(866.14,1417.32)
NetC2_10: C2.10 L1.11 | length 2268.6
  Top Layer w10: C2.10 544.5,1026.72 961.47,1026.72 v1(964.57,1023.62) ; v1(964.57,1417.32) 964.57,1515.75 1220.47,1771.65 1220.47,2007.87 1299.21,2086.61 L1.11
  Bottom Layer w10: v1(964.57,1023.62) v1(964.57,1417.32)
NetM1_10: M1.10 S1.1 S2.1 | length 4989.5
  Top Layer w10: M1.10 2477.17,1571.65 2559.06,1653.54 v1(3622.05,1653.54) ; v1(4016.38,1889.76) 4015.75,1889.13 4015.75,1811.02 4820.67,1006.1 S2.1 ; S1.1 4820.67,2458.46 4842.52,2480.32 4960.63,2480.32 5039.37,2401.57 v1@5039.37,2165.35
  Bottom Layer w10: v1(3622.05,1653.54) 3780.16,1653.54 v1(4016.38,1889.76) ; v1@4016.06,1890.08 4094.49,1968.5 4842.52,1968.5 5038.74,2164.72 v1(5038.74,2165.35)
NetM1_11: M1.11 S1.2 S2.2 | length 5122.6
  Top Layer w10: v1(2519.68,1535.43) 2559.05,1574.8 v1(3622.05,1574.8) ; v1(4016.38,1732.28) 4016.38,1731.65 4770.67,977.36 S2.2 ; S1.2 4770.67,2526.57 4803.15,2559.06 4943.69,2559.06 5078.74,2424 5078.74,2125.98 v1(5039.37,2086.61)
  Bottom Layer w10: M1.11 2377.17,1471.65 2440.94,1535.43 v1(2519.68,1535.43) ; v1(3622.05,1574.8) 3858.58,1574.8 4016.06,1732.28 v1(4016.38,1732.28) ; v1@4016.06,1732.6 4173.23,1889.76 4842.52,1889.76 v1(5039.37,2086.61)
NetM1_12: M1.12 S1.9 S2.9 | length 4537.6
  Top Layer w10: M1.12 2283.46,1408.66 2283.46,1496.06 2519.69,1732.28 v1(3622.05,1732.28) ; v1(3937.64,1929.13) 3937.64,826.14 4330.71,433.07 4409.45,433.07 4470.67,494.29 S2.9 ; v1(4448.82,2018.7) 4470.67,2040.55 S1.9
  Bottom Layer w10: v1(3622.05,1732.28) 3661.42,1732.28 3740.16,1732.28 3937.32,1929.45 4026.57,2018.7 v1(4448.82,2018.7)
NetR1_2: R1.2 T1.8 | length 211.4
  Top Layer w10: R1.2 3113.98,2090.35 T1.8
NetR2_2: R2.2 R3.1 S1.3 | length 3043.6
  Top Layer w10: S1.3 4720.67,2594.69 4763.78,2637.8 4921.26,2637.8 5118.11,2440.94 5118.11,2086.61 4881.89,1850.39 v1(4881.89,1653.54) ; v1(5039.37,1654.17) 5944.25,1654.17 R3.1 ; R3.1@5950.73,1639.76 5950.73,1568.96 5964.25,1555.43 6122.36,1555.43 6141.73,1574.8 R2.2
  Bottom Layer w10: v1(4881.89,1653.54) 4882.52,1654.17 v1(5039.37,1654.17)
NetR4_2: R4.2 R5.1 S1.14 | length 2756.2
  Top Layer w10: S1.14 4722.54,2135.45 4722.54,1733.52 v1(4724.41,1731.65) ; v1(4724.41,1181.1) 5314.96,590.55 R5.1 ; R5.1@5911.36,576.77 5911.36,505.97 5944.88,472.44 6062.99,472.44 6102.36,511.81 R4.2@6102.36,590.55
  Bottom Layer w10: v1(4724.41,1181.1) v1(4724.41,1731.65)
NetR6_2: R6.2 R7.1 S1.4 | length 3797.9
  Top Layer w10: S1.4 4670.67,2623.43 4763.78,2716.54 4921.26,2716.54 5157.48,2480.32 5157.48,2007.87 4925.4,1775.8 4925.4,1688.77 5000,1614.17 5748.03,1614.17 5944.88,1417.32 R7.1 ; R7.1@6462.54,1403.54 6462.54,1332.74 6496.06,1299.21 6614.17,1299.21 6653.54,1338.58 R6.2
NetR8_2: R8.2 R9.1 S1.13 | length 2327.5
  Top Layer w10: S1.13 4670.67,1707.28 5275.59,1102.36 R9.1 ; R9.1@5950.73,1088.58 5950.73,1017.78 5984.25,984.25 6102.36,984.25 6141.73,1023.62 R8.2@6141.73,1102.36
NetR10_2: R10.2 R11.1 S1.5 | length 3512.7
  Top Layer w10: S1.5 4620.67,2623.43 4527.56,2716.54 4370.08,2716.54 4133.86,2480.32 4133.86,1828.22 4993.66,968.43 5342.6,968.43 5356.3,954.72 R11.1 ; R11.1@5360.18,931.1 5360.18,860.3 5393.7,826.77 5511.81,826.77 5551.18,866.14 R10.2@5551.18,944.88
NetR12_2: R12.2 R13.1 S1.12 | length 2625.4
  Top Layer w10: v1(4606.3,1771.65) 4606.3,1861.22 4620.67,1875.59 S1.12 ; v1(5000,1771.65) 5905.51,1771.65 5984.25,1850.39 R13.1 ; R13.1@6462.54,1836.61 6462.54,1765.81 6496.06,1732.28 6614.17,1732.28 6653.54,1771.65 R12.2@6653.54,1850.39
  Bottom Layer w10: v1(4606.3,1771.65) v1(5000,1771.65)
NetR14_2: R14.2 R15.1 S1.6 | length 3917.9
  Top Layer w10: S1.6 4570.67,2594.69 4527.56,2637.8 4370.08,2637.8 4173.23,2440.94 4173.23,1850.39 4842.52,1181.1 v1(5078.74,1181.1) ; v1(5275.59,1889.76) 5314.96,1929.13 R15.1 ; R15.1@5438.92,1915.35 5438.92,1844.55 5472.44,1811.02 5590.55,1811.02 5629.92,1850.39 R14.2@5629.92,1929.13
  Bottom Layer w10: v1(5078.74,1181.1) 5196.85,1181.1 5275.59,1259.84 v1(5275.59,1889.76)
NetR16_2: R16.2 R17.1 S1.11 | length 4567
  Top Layer w10: v1(4282.74,1605.57) 4094.49,1793.83 4094.49,2519.69 4330.71,2755.91 4960.63,2755.91 5236.22,2480.31 R17.1 ; v1(4488.19,1771.65) 4570.67,1854.13 S1.11 ; R17.1@6423.17,2466.54 6423.17,2395.73 6456.69,2362.2 6574.8,2362.2 6614.17,2401.57 R16.2@6614.17,2480.31
  Bottom Layer w10: v1(4282.74,1605.57) 4448.19,1771.02 4487.56,1771.02 v1(4488.19,1771.65)
NetR18_2: R18.2 R19.1 S2.14 | length 1144.5
  Top Layer w10: S2.14 4720.67,476.18 4778.54,418.31 R19.1 ; R19.1@5360.18,419.29 5360.18,348.49 5393.7,314.96 5511.81,314.96 5551.18,354.33 R18.2@5551.18,433.07
NetR20_2: R20.2 R21.1 S2.13 | length 2285.4
  Top Layer w10: S2.13 4670.67,447.44 4763.78,354.33 v1(4960.63,354.33) ; v1(5136.27,1432.09) R21.1 ; R21.1@5399.55,1403.54 5399.55,1332.74 5433.07,1299.21 5551.18,1299.21 5590.55,1338.58 R20.2
  Bottom Layer w10: v1(4960.63,354.33) 4960.63,1296.67 5096.05,1432.09 v1(5136.27,1432.09)
NetR22_2: R22.2 R23.1 S2.12 | length 2841.2
  Top Layer w10: S2.12 4620.67,379.33 4763.78,236.22 v1(5157.48,236.22) ; v1(5472.44,669.29) 5708.66,669.29 5802.17,762.8 R23.1 ; 6462.54,734.25 6462.54,663.45 6496.06,629.92 6614.17,629.92 6653.54,669.29 R22.2@6653.54,748.03
  Bottom Layer w10: v1(5157.48,236.22) 5157.48,472.44 5354.33,669.29 v1(5472.44,669.29)
NetR24_2: R24.2 R25.1 S2.11 | length 5599
  Top Layer w10: S2.11 4570.67,476.18 4488.19,393.7 4291.34,393.7 3897.64,787.4 3897.64,1968.5 4055.12,2125.98 4055.12,2559.06 4299.52,2803.46 4991.82,2803.46 5236.22,2559.06 v1(5787.4,2559.06) ; v1(5787.4,2283.46) 5879.92,2190.94 R25.1 5950.73,2120.14 5964.25,2106.61 6122.36,2106.61 6141.73,2125.98 R24.2
  Bottom Layer w10: v1(5787.4,2283.46) v1(5787.4,2559.06)
RX: M1.13 T1.4 | length 2421.9
  Top Layer w10: M1.13 2177.17,1507.87 2480.32,1811.02 3700.79,1811.02 3779.53,1889.76 3779.53,2165.35 3704.53,2240.35 T1.4
S1_C: C3.10 R22.1 | length 901.6
  Top Layer w10: R22.1 6732.28,1141.73 7007.87,1417.32 C3.10
S1_D: C3.11 R20.1 | length 2546.9
  Top Layer w10: R20.1 5748.03,1417.32 5772.72,1392.63 5826.77,1338.58 v1(5827.4,1338.58) ; v1(6417.32,511.81) 6771.65,511.81 6929.13,669.29 6929.13,1102.36 C3.11
  Bottom Layer w10: v1(5827.4,1338.58) 5826.77,1337.95 5826.77,1102.36 v1(6417.32,511.81)
S1_E: C3.12 R18.1 | length 2059.6
  Top Layer w10: R18.1 6811.02,433.07 7007.87,629.92 7007.87,1062.99 C3.12
"SDC END": C3.7 R24.1 | length 1080.9
  Top Layer w10: R24.1 6692.91,2204.72 C3.7
"TEMP OK": L2.2 M1.1 | length 2545
  Top Layer w10: L2.2 3285.83,2659.06 3248.03,2696.85 3248.03,2775.59 3287.4,2814.96 3759.84,2814.96 3838.58,2736.22 3838.58,1574.8 3779.53,1515.75 3444.88,1515.75 3377.17,1448.03 M1.1
TX: M1.5 T1.1 | length 1525
  Top Layer w10: v1(2992.13,1889.76) 3661.42,1889.76 3700.79,1929.13 3700.79,2047.24 3657.68,2090.35 T1.1
  Bottom Layer w10: M1.5 2984.65,1409.84 2984.65,1882.28 v1(2992.13,1889.76)
pads on no net: C1.6 C1.M1 C2. C3. L2.4 L2.5 L2.6 L2.8 L2.9 L2.10 L2.11 L2.12 L2.13 M1.2 M1.3 M1.7 M1.8 M1.18 M1.20 M1.21 M1.28 M1.30 S1.7 S1.10 S1.15 S2.7 S2.10 S2.15 T1.5

## Polygon pours and split planes (outlines as drawn)
GND on Bottom Layer "GND_L01_P000" (solid, pour order 3): 7678.77,4.61 7678.77,2836.18 1.54,2836.18 0,2834.65 0,3.07 7677.24,3.07
GND on Bottom Layer "GND_L01_P000" (solid, pour order 1): 7678.77,3.07 7678.77,2834.65 1.54,2834.65 0,2836.18 0,1.54 7677.24,1.54
GND on Top Layer "GND_L01_P000" (solid, pour order 2): 7678.77,1.54 7678.77,2833.11 1.54,2833.11 0,2834.65 0,0 7677.24,0

## Silkscreen, mask and mechanical layers (free items; w line width, h text height)
Top Overlay:
  drawing of 43 lines, arcs and shapes, not listed
  text "TEMP OK" at 692.94,2066.93 h39.37
  text "CANL" at 688.98,1929.13 h47.24
  text "GND" at 933.09,1929.13 h39.37
  text "CANH" at 688.98,1751.97 h47.24
  text "+5V" at 933.09,1751.97 h39.37
  text "GND" at 933.09,964.57 h39.37
  text "PA6" at 690,964.1 h47.24
  text "SDC" at 6909.45,925.2 h47.24
  text "AIR+" at 7145.67,925.2 h39.37
  text "PA5" at 682.1,806.62 h47.24
  text "+5V" at 926.22,806.62 h39.37
  text "BMS OK" at 6948.82,767.72 h31.5
  text "AIR-" at 7145.67,767.72 h39.37
  text "PA4" at 682.1,649.14 h47.24
  text "MUX 4th Bit" at 933.09,629.92 h19.68
  text "IMD OK" at 6948.82,610.24 h31.5
  text "PC1" at 7145.67,610.24 h47.24
  text "PA3" at 682.1,491.66 h47.24
  text "MUX 3rd Bit" at 933.09,472.44 h19.68
  text "S1_C" at 6909.45,452.76 h39.37
  text "PC2" at 7145.67,452.76 h47.24
  text "MUX 2nd Bit" at 933.09,314.96 h19.68
  text "PA1" at 682.1,294.81 h47.24
  text "S1_D" at 6909.45,295.28 h39.37
  text "MC1" at 7145.67,295.28 h47.24
  text "MUX 1st Bit" at 933.09,137.8 h19.68
  text "S1_E" at 6909.45,137.8 h39.37
  text "MC2" at 7145.67,137.8 h47.24
  text "PA0" at 682.1,137.33 h47.24
  text "Viking Motor Sports / Accumulator STM Board / 04/09/2023" at 2657.48,59.06 h78.74